# Altium PCB PCB1.PcbDoc (part 2 of 4)
Units mm, origin at the board's own origin, x right, y up, seen from the top; angles counter-clockwise.
Board outline 190.88 x 117.47 mm, 2 copper layers (Top Layer, Bottom Layer); 405 components, 307 nets, 1341 pads, 251 vias.
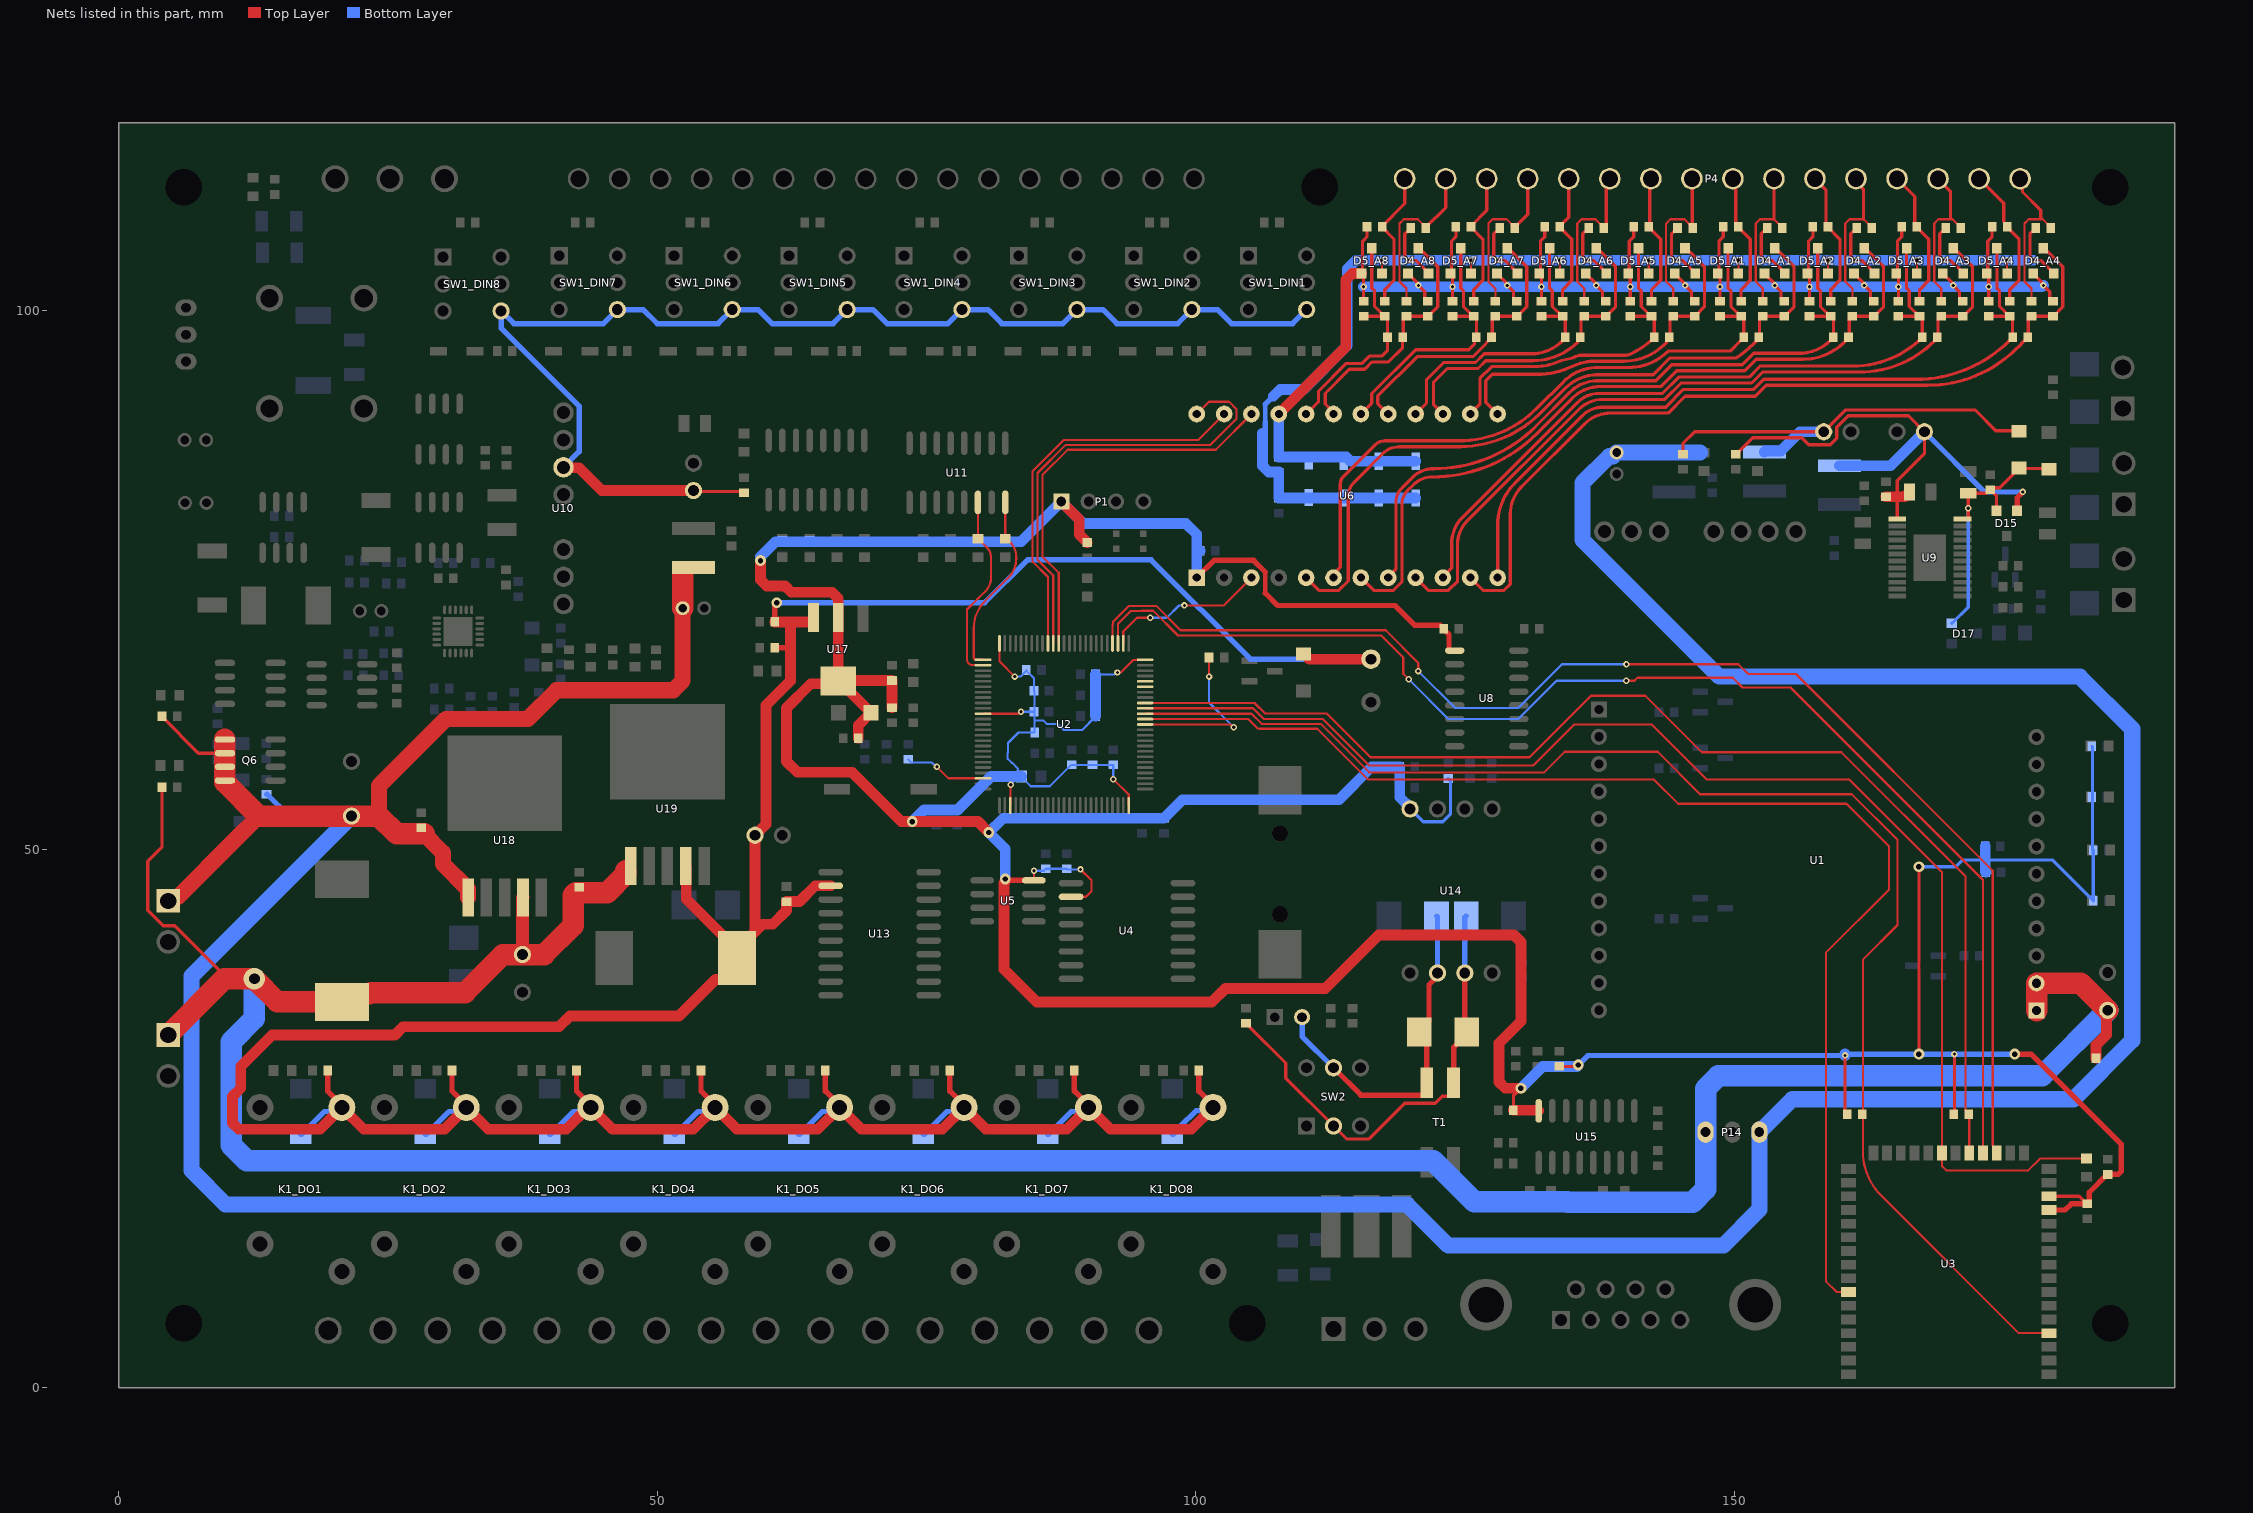
[diagram p2: the nets of this part, all layers, seen from the top]

## Part data
BT1: library part Battery, "Multicell Battery"
C1 C60 C69 C70 C71 C73 C76: library part "Cap Pol1", "Polarized Capacitor (Radial)"
C2 C3 C4 C7 C8 C9 C10 C11 C12 C13 C14 C15 C16 C17 C18 C19 C20 C27 C31 C32 C44 C45 C47 C48 C49 C50 C51 C52 C53 C54 C55 C56 C57 C58 C59 C80: library part 无极电容, "无极电容"
C5 C28 C64 C66 C68 C72 C74 C75 C77: library part Cap, "Capacitor"
C6 C21_A1 C21_A2 C21_A3 C21_A4 C21_A5 C21_A6 C21_A7 C21_A8 C22_A1 C22_A2 C22_A3 C22_A4 C22_A5 C22_A6 C22_A7 C22_A8 C23_A1 C23_A2 C23_A3 C23_A4 C23_A5 C23_A6 C23_A7 C23_A8 C24 C25 C33 C34 C35 C36 C37 C38 C39 C40 C41 C42 C78 C82 C83: library part CAP, "Capacitor"
C26 C29 C30 C43 C46 C81 C84 C85: library part 有极电容, "有极电容"
C62: library part Cap, "50V，10%，X7R"
C63: library part Cap, "16V，10%，X7R"
C65: library part "Cap Pol1", "50V，10%，X7R"
C67: library part Cap, "50V, 10%, X7R"
C79: library part 有极电容, "钽电容"
D1 D2: library part "D Zener", "Zener Diode"
D3 D10 D11 D13 D26 D27 D28: library part "D Schottky", "Schottky Diode"
D4_A1 D4_A2 D4_A3 D4_A4 D4_A5 D4_A6 D4_A7 D4_A8 D5_A1 D5_A2 D5_A3 D5_A4 D5_A5 D5_A6 D5_A7 D5_A8 D15 D17: "Silicon Low-Leakage Diode Array connected in series"
D6 D7 D8 D9 D20_DIN1 D20_DIN2 D20_DIN3 D20_DIN4 D20_DIN5 D20_DIN6 D20_DIN7 D20_DIN8: "Surface Mount Zener Diode"
D12 D14 D16 D23 D25: library part SMBJ12CA, "Transient Voltage  Suppressors (TVS)"
D21_DO1 D21_DO2 D21_DO3 D21_DO4 D21_DO5 D21_DO6 D21_DO7 D21_DO8: library part Diode, "Default Diode"
D24: "Transient Voltage  Suppressors (TVS)"
FB1 FB2 R1 R2 R3 R4 R6 R7 R8 R9 R10 R11 R12 R13 R15 R16 R17 R18 R19 R20 R21 R22 R23_A1 R23_A2 R23_A3 R23_A4 R23_A5 R23_A6 R23_A7 R23_A8 R24_A1 R24_A2 R24_A3 R24_A4 R24_A5 R24_A6 R24_A7 R24_A8 R25_A1 R25_A2 R25_A3 R25_A4 R25_A5 R25_A6 R25_A7 R25_A8 R26_A1 R26_A2 R26_A3 R26_A4 R26_A5 R26_A6 R26_A7 R26_A8 R27 R29 R30 R37 R38 R39 R41 R42 R43 R44 R45 R46 R47 R48 R49 R50_DIN1 R50_DIN2 R50_DIN3 R50_DIN4 R50_DIN5 R50_DIN6 R50_DIN7 R50_DIN8 R51_DIN1 R51_DIN2 R51_DIN3 R51_DIN4 R51_DIN5 R51_DIN6 R51_DIN7 R51_DIN8 R52_DO1 R52_DO2 R52_DO3 R52_DO4 R52_DO5 R52_DO6 R52_DO7 R52_DO8 R53 R54 R55 R56 R57 R58 R59 R60 R61 R62 R63 R64: library part 电阻, "电阻"
GDT1: "Gas Discharge Tube"
J1: library part "D Connector 9", "Receptacle Assembly, 9 Position, Right Angle"
L1 L2 L3 L4: library part "Inductor Iron", "Magnetic-Core Inductor"
L5 L6 L7: library part Inductor, "Inductor"
LED1 LED2 LED3 LED4 LED5 LED6 LED7 LED8 LED9 LED10 LED11 LED12 LED13 LED14 LED15_DO1 LED15_DO2 LED15_DO3 LED15_DO4 LED15_DO5 LED15_DO6 LED15_DO7 LED15_DO8 LED16 LED17 LED18 LED19 LED20 LED21 LED22 LED23 LED24 LED25 LED26: library part LED0603, "Typical INFRARED GaAs LED"
P1: library part "Header 4", "Header, 4-Pin"
P2: library part "Header 2", "Header, 2-Pin"
P5: library part WJ15EDGRC-3.81-3P, "WJ15EDGRC-3.81-3P"
P7: library part "Header 3", "Header, 3-Pin"
P11: library part WJ15EDGRC-3.81-16P, "WJ15EDGRC-3.81-16P"
P14: library part C3-3Pin, "C3连接器插座, 3-Pin"
Q1 Q2 Q3 Q4 Q5: "NPN General Purpose Amplifier"
Q6 Q9 Q10 Q11: "P-Channel Power MOSFET"
Q7: library part S8050, "NPN General Purpose Amplifier"
Q12 Q13: "N-Channel Power MOSFET"
R5 R28 R40 R68 R69 R77 R78 R81 R86 R88 R89 R90 R91 R92: library part Res2, "精度5%"
R65 R66 R67 R70 R82: library part Res1, "精度5%"
R71 R72 R73 R74 R75 R76: library part Res1, "精度0.5%"
R79 R80 R84 R85: library part Res2, "精度0.5%"
R83 R87: library part Res2, "精度1%"
RAC1 RSR1: library part Res1, "Resistor"
S1: library part SW-PB, "Switch"
S2: library part SW-DPST, "Double-Pole, Single-Throw Switch"
SU1: library part Bell, "Electrical Bell"
SW1_DIN1 SW1_DIN2 SW1_DIN3 SW1_DIN4 SW1_DIN5 SW1_DIN6 SW1_DIN7 SW1_DIN8 SW2: "按键开关 六脚 外扣 有声自锁"
T1: "共模电感，电感 @ 频率：51uH @ 100kHz ，直流电阻（DCR）（最大） 140mΩ"
U1: library part Component_1
U2: library part STM32F103VX, "STM32F103VX"
U4: "高精度、I2C接口、集成RTC/TCXO/晶体"
U5: library part MB85RC16V
U7: "3W，宽电压输入，隔离稳压正负双路/单路输出 DC/DC 模块电源"
U8: "Robust EMC, Low Power, 4 Out Channel, 2 Input Channel Digital Isolators."
U9: "单通道、12/16位、串行输入、内置电流源 / 和电压输出DAC，具有HART连接能力"
U10: "3W，宽电压输入，隔离稳压输出 DC/DC 模块电源"
U11 U12: library part TLP624-4
U13: library part TPIC6B595
U14: "隔离485"
U15: "3.0V TO 5.5V, Low-Power, up to 1Mbps, True RS-232 Transceiver Using Four 0.1礔 External Capacitor"
U16: library part BQ24616, "TI电源管理IC；"
U17: library part ams1117, "ams1117"
U18 U19: library part XL2596S, "3A 150KHz 40V Buck DC to DC Converter"

## Free pads (board coordinates)
  round 1.524 hole 3.4: 1(6,6) 1(104.775,6) 1(111.506,111.506) 1(184.881,111.475) 1(184.881,6) 2(6,111.475)

## Via types
v1: diameter 0.6, hole 0.3, Top Layer to Bottom Layer, 163 vias
v2: diameter 0.8, hole 0.4, Top Layer to Bottom Layer, 40 vias
v3: diameter 1, hole 0.5, Top Layer to Bottom Layer, 30 vias
v4: diameter 1.27, hole 0.711, Top Layer to Bottom Layer, 11 vias
v5: diameter 1.5, hole 1, Top Layer to Bottom Layer, 4 vias
v6: diameter 2, hole 1.5, Top Layer to Bottom Layer, 2 vias
v7: diameter 2, hole 1, Top Layer to Bottom Layer, 1 vias

## Nets (pads, with @x,y where several pads share a name; then routed paths per layer and width w, separated by ;. In a path a pad name is that pad's centre, name@x,y a point inside that pad or via, vN(x,y) a via of type N, cw(c..) or ccw(c..) an arc to the next point about the centre after c; other vN are vias at no path point)
3V3: C3.2 C7.1 C8.2 C9.2 C10.2 C11.2 C12.2 C13.2 C14.2 C15.2 C16.2 C17.2 C18.2 C19.2 C20.2 C24.1 C31.2 C49.1 C50.1 C53.2 C79.1 C80.2 FB1.1 P1.1 R1.2 R2.2 R4.2 R6.2 R7.2 R8.2 R15.2 R16.2 R18.1 R19.1 R20.1 R21.2 R22.2 R40.2 R42.2 R43.2 R44.2 R45.2 R46.2 R47.2 R48.2 R49.2 R56.2 R60.2 U2.11 U2.28 U2.50 U2.75 U2.100 U3.13 U3.14 U4.2 U5.8 U6.1 U8.1 U14.1 U15.16 U17.2 | length 505.1
  Top Layer w0.2: U2.11@80.232,62.595 83.466,62.595 ; U2.100@81.757,69.12 81.757,67.468 v1(83.185,66.04) ; U2.28@82.757,54.07 82.767,54.08 82.767,55.959 v1(82.815,56.007) ; U5.8@84.95,47.117 84.963,47.13 v1(84.963,48.006) ; U4.2@88.405,45.593 89.789,45.593 90.297,46.101 90.297,47.117 v1(89.281,48.133) ; v1(92.329,56.515) 93.757,55.087 U2.50@93.757,54.07 ; v1(92.71,66.421) 93.027,66.421 94.201,67.595 U2.75@95.282,67.595
  Top Layer w0.3: C53.2@129.478,25.781 129.478,27.116 v3@129.826,27.464 ; R60.2@133.726,29.845 135.382,29.845 v3(135.509,29.972) ; R16.2@160.274,25.4 v1(160.274,30.861) ; v3(167.132,30.988) v3(167.132,48.387) ; R21.2@170.434,25.369 v1(170.434,30.988) ; U3.14@179.197,17.78 182.006,17.78 182.703,17.083 C3.2@182.753,17.083
  Top Layer w0.4: 106.435,73.796 106.435,75.754
  Top Layer w0.5: v3@82.558,47.117 U5.8@84.95,47.117 ; U6.1@100.076,75.224 101.687,76.835 105.354,76.835 106.435,75.754 ; 106.435,73.796 107.587,72.644 118.491,72.644 120.332,70.802 122.681,70.802 122.798,70.685 122.848,70.685 122.998,70.535 C31.2@122.998,70.485 122.998,70.435 123.494,69.939 123.494,68.499 123.54,68.453 U8.1@124.028,68.453 ; v3(176.022,30.988) 177.546,30.988 185.928,22.606 185.928,20.116 185.635,19.823 184.858,19.823 184.847,19.812 184.608,19.812 182.953,18.157 182.953,17.233 182.803,17.083 C3.2@182.753,17.083 ; U3.13@179.197,16.51 180.713,16.51 181.286,17.083 C3.2@182.703,17.083
  Top Layer w1: v3(59.563,76.808) 59.563,75.035 60.149,74.449 61.849,74.449 62.422,73.876 66.202,73.876 66.788,73.29 U17.2@66.788,71.528 U17.2@66.788,65.628 ; U17.2@68.202,65.682 R40.2@71.787,65.682 R19.1@71.787,63.145 ; C80.2@68.645,60.325 68.645,61.511 C79.1@69.816,62.682 69.616,62.882 67.938,64.56 67.938,64.778 67.088,65.628 U17.2@66.788,65.628 ; v3(80.772,51.562) 79.756,52.578 v3(73.66,52.578) 72.644,52.578 68.072,57.15 62.992,57.15 61.976,58.166 61.976,63.119 64.224,65.367 66.527,65.367 U17.2@66.788,65.628 ; v3@82.296,46.99 82.169,46.863 82.169,38.862 85.217,35.814 101.473,35.814 102.743,37.084 112.014,37.084 116.967,42.037 129.54,42.037 130.175,41.402 130.175,34.036 128.143,32.004 128.143,28.399 128.729,27.813 v3(130.175,27.813) ; P1.1@87.503,82.296 89.167,80.632 89.167,79.238 R15.2@89.916,78.489 ; C53.2@129.478,25.781 131.763,25.781 U15.16@131.826,25.718
  Bottom Layer w0.2: v1(82.815,56.007) 82.815,56.022 83.148,56.355 83.409,56.355 83.409,56.369 FB1.1@83.809,56.769 83.468,57.11 83.468,57.502 82.935,58.035 82.899,58.035 82.516,58.419 82.516,58.96 82.55,58.995 82.55,59.872 83.522,60.844 C15.2@85.025,60.844 85.025,61.976 ; v1(83.185,66.04) 83.704,66.04 C12.2@84.259,66.595 ; v1(83.757,62.778) C13.2@84.96,62.778 ; FB1.1@83.878,56.65 84.663,55.865 86.429,55.865 88.412,57.847 C9.2@88.462,57.847 C16.2@90.395,57.847 C10.2@92.329,57.847 v1(92.329,56.515) ; C12.2@84.259,66.645 C12.2@84.259,66.595 ; v1(84.963,48.006) 85.87,48.006 C7.1@86.059,48.195 C8.2@88.011,48.195 88.073,48.133 v1(89.281,48.133) ; C18.2@90.678,62.377 90.678,62.327 89.438,61.087 87.725,61.087 87.164,61.648 86.139,61.648 85.811,61.976 85.025,61.976 ; C17.2@90.678,66.245 92.426,66.245 92.602,66.421 v1(92.71,66.421) ; C12.2@84.259,66.595 84.96,65.894 C14.2@84.96,64.711 85.025,64.646 85.025,61.976
  Bottom Layer w0.254: R47.2@64.135,78.551 R47.2@64.135,78.678
  Bottom Layer w0.3: U14.1@119.888,53.757 121.092,52.553 122.927,52.553 123.632,53.258 123.632,56.382 R56.2@123.437,56.577 ; v3(167.132,48.387) 170.561,48.387 171.196,49.022 173.287,49.022 179.513,49.022 183.023,45.512 183.073,45.512 R6.2@183.323,45.262 ; R1.2@183.196,59.563 183.259,59.5 183.259,49.975 R7.2@183.323,49.911 R6.2@183.323,45.262 ; R6.2@183.323,45.212 R6.2@183.323,45.262
  Bottom Layer w0.5: v3(135.509,29.972) 136.398,30.861 v1(160.274,30.861) ; v1@160.274,30.988 v3(167.132,30.988) v1(170.434,30.988) v3(176.022,30.988)
  Bottom Layer w1: v3(59.563,76.808) 59.563,77.162 60.952,78.551 64.135,78.551 R45.2@66.675,78.551 R43.2@69.215,78.551 R48.2@74.676,78.551 R46.2@77.216,78.551 R44.2@79.756,78.551 R42.2@82.296,78.551 83.758,78.551 P1.1@87.503,82.296 89.535,80.264 99.06,80.264 100.076,79.248 C24.1@100.076,77.724 ; v3(73.66,52.578) 74.741,53.659 C11.2@75.917,53.659 C19.2@77.851,53.659 80.961,56.769 FB1.1@83.809,56.769 ; v3(82.296,47.244) 82.295,50.039 82.002,50.331 v3(80.772,51.562) 82.107,52.897 R20.1@94.996,52.897 R18.1@97.028,52.897 98.741,54.61 113.284,54.61 116.332,57.658 C50.1@118.934,57.658 C49.1@118.934,55.724 118.934,54.837 119.888,53.883 U14.1@119.888,53.757 ; C18.2@90.678,62.377 C20.2@90.678,64.311 C17.2@90.678,66.245 ; U6.1@100.076,75.224 C24.1@100.076,77.724 ; C24.1@100.392,77.724 C24.1@100.076,77.724 ; v3(130.175,27.813) 132.207,29.845 135.382,29.845 v3(135.509,29.972) ; v1(160.274,30.861) v1@160.274,30.988 ; R4.2@173.287,50.292 173.287,49.022 173.287,47.944 R2.2@173.352,47.879
5V: C48.2 C78.2 C85.1 D3.2 D21_DO1.2 D21_DO2.2 D21_DO3.2 D21_DO4.2 D21_DO5.2 D21_DO6.2 D21_DO7.2 D21_DO8.2 K1_DO1.2 K1_DO2.2 K1_DO3.2 K1_DO4.2 K1_DO5.2 K1_DO6.2 K1_DO7.2 K1_DO8.2 L7.2 R28.2 R52_DO1.1 R52_DO2.1 R52_DO3.1 R52_DO4.1 R52_DO5.1 R52_DO6.1 R52_DO7.1 R52_DO8.1 SU1.2 U13.2 U17.3 U19.4 | length 357.1
  Top Layer w0.5: R52_DO1.1@19.369,29.464 19.369,27.542 20.691,26.22 K1_DO1.2@20.691,26.035 ; R52_DO2.1@30.926,29.464 30.926,27.542 32.248,26.22 K1_DO2.2@32.248,26.035 ; R52_DO3.1@42.483,29.464 42.483,27.542 43.805,26.22 K1_DO3.2@43.805,26.035 ; R52_DO4.1@54.04,29.464 54.04,27.542 55.362,26.22 K1_DO4.2@55.362,26.035 ; R28.2@60.898,68.707 62.23,68.707 62.357,68.834 ; C78.2@60.898,71.12 60.898,71.32 60.898,72.574 61.087,72.763 v3(61.087,72.898) ; R52_DO5.1@65.597,29.464 65.597,27.542 66.919,26.22 K1_DO5.2@66.919,26.035 ; R52_DO6.1@77.154,29.464 77.154,27.542 78.476,26.22 K1_DO6.2@78.476,26.035 ; R52_DO7.1@88.711,29.464 88.711,27.542 90.033,26.22 K1_DO7.2@90.033,26.035 ; R52_DO8.1@100.268,29.464 100.268,27.542 K1_DO8.2@101.59,26.22 ; K1_DO8.2@101.59,26.22 K1_DO8.2@101.59,26.035 K1_DO8.2@101.59,26.22
  Top Layer w1: U19.4@52.629,48.455 52.663,48.42 52.663,45.398 57.135,40.926 L7.2@57.389,40.926 ; C78.2@60.898,71.12 62.357,71.12 ; U17.3@64.488,71.528 64.488,71.12 62.357,71.12 ; U13.2@66.084,46.609 64.643,46.609 63.181,45.147 C48.2@61.976,45.147 61.976,44.323 60.706,43.053 59.77,43.053 L7.2@59.055,42.338 ; K1_DO8.2@101.59,26.035 99.558,24.003 92.065,24.003 K1_DO7.2@90.033,26.035 88.001,24.003 80.508,24.003 K1_DO6.2@78.476,26.035 76.444,24.003 68.951,24.003 K1_DO5.2@66.919,26.035 64.887,24.003 57.394,24.003 K1_DO4.2@55.362,26.035 53.33,24.003 45.837,24.003 K1_DO3.2@43.805,26.035 43.561,26.035 41.529,24.003 34.28,24.003 K1_DO2.2@32.248,26.035 30.216,24.003 22.723,24.003 K1_DO1.2@20.691,26.035 18.659,24.003 11.127,24.003 10.541,24.589 10.541,27.051 11.303,27.813 11.303,29.845 14.224,32.766 25.631,32.766 26.381,33.516 40.859,33.516 41.875,34.532 51.999,34.532 55.389,37.922 56.139,37.922 57.389,39.172 L7.2@57.389,39.922 57.389,40.672 L7.2@59.055,42.338 ; D3.2@109.982,68.121 110.082,68.021 110.182,68.021 110.544,67.659 SU1.2@116.244,67.659 ; L7.2@59.055,42.338 C85.1@59.055,51.308 60.071,52.324 60.071,63.373 62.357,65.659 62.357,68.834 62.357,71.12
  Bottom Layer w0.5: D21_DO1.2@16.891,23.554 16.991,23.554 19.089,25.652 20.308,25.652 K1_DO1.2@20.691,26.035 ; D21_DO2.2@28.448,23.554 28.548,23.554 30.646,25.652 31.865,25.652 K1_DO2.2@32.248,26.035 ; D21_DO3.2@40.005,23.554 40.105,23.554 42.203,25.652 43.422,25.652 K1_DO3.2@43.805,26.035 ; D21_DO4.2@51.562,23.554 51.662,23.554 53.76,25.652 54.979,25.652 K1_DO4.2@55.362,26.035 ; v3(61.087,72.898) 80.385,72.898 84.364,76.877 95.837,76.877 105.055,67.659 SU1.2@116.244,67.659 ; D21_DO5.2@63.119,23.554 63.219,23.554 65.317,25.652 66.536,25.652 K1_DO5.2@66.919,26.035 ; D21_DO6.2@74.676,23.554 74.776,23.554 76.874,25.652 78.093,25.652 K1_DO6.2@78.476,26.035 ; D21_DO7.2@86.233,23.554 86.333,23.554 88.431,25.652 89.65,25.652 K1_DO7.2@90.033,26.035 ; D21_DO8.2@97.79,23.554 97.89,23.554 98.54,24.204 98.54,24.245 100.046,25.751 K1_DO8.2@101.306,25.751
12V: C1.1 C2.2 C83.1 C84.1 L6.2 P13.1 P14.1 R88.2 U1.13 U1.14 U18.4 U19.1 | length 300.3
  Top Layer w0.3: R88.2@3.999,55.753 3.999,50.236 2.667,48.905 2.667,44.346 4.107,42.906 5.195,42.906 9.779,38.322 9.779,37.973
  Top Layer w1: C2.2@183.577,30.607 183.577,31.809 184.543,32.775 184.543,34.937 C1.1@184.658,35.052
  Top Layer w1.2: C84.1@37.459,40.231 37.488,40.259 37.488,45.506 U18.4@37.516,45.534
  Top Layer w2: P13.1@4.572,32.766 9.779,37.973 v7(12.573,37.973) 14.717,35.829 L6.2@20.701,35.829 21.451,36.579 23.248,36.579 23.372,36.703 32.131,36.703 35.659,40.231 C84.1@37.459,40.231 39.469,40.231 42.164,42.926 42.164,45.72 42.418,45.974 45.327,45.974 47.058,47.705 U19.1@47.058,47.99 ; U1.13@178.054,35.027 U1.14@178.054,37.567 182.143,37.567 C1.1@184.658,35.052
  Bottom Layer w2: v7(12.573,37.973) 12.573,34.29 10.414,32.131 10.414,22.519 11.851,21.082 122.047,21.082 125.857,17.272 134.454,17.272 134.484,17.242 146.118,17.242 147.32,18.444 P14.1@147.32,23.749 147.32,27.784 148.492,28.956 178.562,28.956 C1.1@184.658,35.052
24V: C26.1 C28.2 C43.1 C81.1 C82.1 L1.1 L4.1 P12.1 P14.3 Q6.5 Q6.6 Q6.7 Q6.8 R5.2 U18.1 | length 444.7
  Top Layer w0.254: C82.1@28.067,52.005 28.067,51.689 28.321,51.435
  Top Layer w0.3: R5.2@3.999,62.357 3.999,62.307 7.378,58.928 Q6.6@9.842,58.928
  Top Layer w1.5: P12.1@4.572,45.212 4.922,45.562 5.463,45.562 10.725,50.824 12.987,53.086 ; 24.13,53.086 24.13,55.88 30.353,62.103 37.973,62.103 40.64,64.77 51.461,64.77 52.34,65.649 C43.1@52.34,72.39 ; 28.321,51.435 30.074,49.682 30.074,48.655 32.41,46.319 U18.1@32.41,45.534
  Top Layer w2: Q6.8@9.842,56.388 Q6.8@9.842,56.231 ; Q6.5@9.842,60.198 Q6.6@9.842,58.928 Q6.7@9.842,57.658 Q6.8@9.842,56.231 ; 28.321,51.435 25.781,51.435 24.13,53.086 C81.1@21.59,53.086 12.987,53.086 Q6.8@9.842,56.231 ; C43.1@52.34,72.39 L4.1@52.34,75.778
  Bottom Layer w0.5: C28.2@13.7,55.115 13.75,55.115 15.779,53.086 C81.1@21.59,53.086
  Bottom Layer w1.5: C81.1@21.59,53.086 6.731,38.227 6.731,20.193 9.906,17.018 119.634,17.018 123.444,13.208 148.971,13.208 152.32,16.557 152.32,23.999 152.57,23.999 155.368,26.797 181.483,26.797 186.944,32.258 186.944,61.174 182.078,66.04 148.59,66.04 135.89,78.74 135.89,84.016 138.38,86.506 138.719,86.506 C26.1@139.065,86.852 144.399,86.852 146.796,86.852
+DAC_15V: C29.1 D13.1 L2.1 R29.2 | length 40.6
  Top Layer w0.3: R29.2@145.217,86.679 145.217,87.686 146.304,88.773 C29.1@158.293,88.773 160.325,90.805 172.339,90.805 174.272,88.872 D13.1@176.443,88.872
  Bottom Layer w1: L2.1@152.781,86.89 152.881,86.99 154.3,86.99 156.083,88.773 C29.1@158.293,88.773
+ISO_DI_12V: C46.1 R41.2 SW1_DIN1.6 SW1_DIN2.6 SW1_DIN3.6 SW1_DIN4.6 SW1_DIN5.6 SW1_DIN6.6 SW1_DIN7.6 SW1_DIN8.6 U10.6 | length 118.2
  Top Layer w0.3: C46.1@52.832,83.312 52.928,83.216 57.943,83.216 R41.2@58.039,83.12
  Top Layer w1: U10.6@41.275,85.471 41.309,85.437 42.706,85.437 44.831,83.312 C46.1@52.832,83.312
  Bottom Layer w0.5: U10.6@41.275,85.471 42.729,86.925 42.729,91.153 35.482,98.4 SW1_DIN8.6@35.482,99.989 36.659,98.812 44.973,98.812 SW1_DIN7.6@46.277,100.116 48.678,100.116 49.982,98.812 55.641,98.812 SW1_DIN6.6@56.945,100.116 59.346,100.116 60.65,98.812 66.309,98.812 SW1_DIN5.6@67.613,100.116 70.014,100.116 71.318,98.812 76.977,98.812 SW1_DIN4.6@78.281,100.116 80.682,100.116 81.986,98.812 87.645,98.812 SW1_DIN3.6@88.949,100.116 91.35,100.116 92.654,98.812 98.313,98.812 SW1_DIN2.6@99.617,100.116 102.018,100.116 103.322,98.812 108.981,98.812 SW1_DIN1.6@110.285,100.116
+VDAC: C34.1 C35.1 D11.2 D13.2 D15.2 D17.2 U9.24 | length 25.2
  Top Layer w0.3: U9.24@171.171,80.67 171.629,80.67 171.704,80.745 v1@171.704,81.91 ; v1(171.704,81.661) v1@171.704,81.91 ; D15.2@174.332,81.439 174.332,82.846 173.804,83.374 C35.1@173.754,83.374 ; D11.2@179.197,85.245 179.07,85.372 176.443,85.372 174.654,83.583 173.963,83.583 C35.1@173.754,83.374 ; v1@171.704,81.91 C34.1@171.704,83.074 173.404,83.074 173.704,83.374 C35.1@173.754,83.374
  Bottom Layer w0.3: D17.2@170.18,70.988 170.205,70.988 171.704,72.487 v1(171.704,81.661)
-DAC_15V: C30.2 C36.1 C37.1 D15.1 L3.1 R30.2 U9.1 | length 55
  Top Layer w0.3: R30.2@150.114,86.679 150.164,86.679 151.704,88.219 156.256,88.219 156.906,87.569 158.894,87.569 159.512,88.187 159.512,89.209 160.554,90.251 166.162,90.251 C30.2@167.64,88.773 167.64,86.741 165.125,84.226 165.125,82.739 U9.1@165.125,80.67
  Top Layer w0.5: D15.1@176.232,81.439 176.263,81.47 176.263,82.664 v1(176.784,83.185)
  Top Layer w1: C37.1@164.084,82.739 165.125,82.739 165.813,82.739 165.984,82.91 166.259,82.91 C36.1@166.259,83.185
  Bottom Layer w0.5: C30.2@167.64,88.773 173.228,83.185 v1(176.784,83.185)
  Bottom Layer w1: L3.1@159.766,85.62 164.487,85.62 C30.2@167.64,88.773
A: D24.1 D25.2 P2.2 SW2.5 T1.4 U14.9 | length 33.1
  Top Layer w0.5: SW2.5@112.776,29.718 115.316,27.178 121.082,27.178 121.432,27.528 T1.4@121.432,28.338 ; T1.4@121.432,28.338 121.432,32.324 D24.1@120.736,33.02 121.636,33.92 121.636,37.427 122.428,38.22 U14.9@122.428,38.517
  Bottom Layer w0.5: P2.2@109.855,34.417 109.855,32.639 SW2.5@112.776,29.718 ; D25.2@122.338,43.815 122.428,43.725 U14.9@122.428,38.517
ADC1_IN0: R82.1 U2.23 | length 7.7
  Top Layer w0.2: v1(75.946,57.658) 77.009,56.595 U2.23@80.232,56.595
  Bottom Layer w0.2: R82.1@73.279,58.355 73.579,58.055 75.495,58.055 75.892,57.658 v1(75.946,57.658)
ADC_CLK: U2.89 U6.22 | length 38
  Top Layer w0.2: U2.89@87.257,69.12 87.257,75.684 85.744,77.197 85.744,84.755 88.092,87.103 101.835,87.103 U6.22@105.156,90.424
ADC_CS: U2.77 U6.3 | length 15.1
  Top Layer w0.2: U2.77@93.257,69.12 93.257,70.23 94.528,71.501 v1(95.758,71.501) ; v1(98.933,72.644) 102.576,72.644 U6.3@105.156,75.224
  Bottom Layer w0.2: v1(95.758,71.501) 97.282,71.501 98.425,72.644 v1(98.933,72.644)
ADC_IN_5.1V_A1: C25.1 D4_A1.2 D4_A2.2 D4_A3.2 D4_A4.2 D4_A5.2 D4_A6.2 D4_A7.2 D4_A8.2 D5_A1.2 D5_A2.2 D5_A3.2 D5_A4.2 D5_A5.2 D5_A6.2 D5_A7.2 D5_A8.2 D6.2 D7.2 D8.2 D9.2 R23_A1.2 R23_A2.2 R23_A3.2 R23_A4.2 R23_A5.2 R23_A6.2 R23_A7.2 R23_A8.2 R27.2 | length 160
  Top Layer w0.2: D5_A8.2@117.282,103.473 v1(117.282,104.709) ; v1(119.7,104.709) v1@119.761,104.648 ; D5_A7.2@125.537,103.473 v1(125.537,104.709) ; v1(127.955,104.709) v1@128.016,104.648 ; D5_A6.2@133.792,103.473 v1(133.792,104.709) ; v1(136.21,104.709) v1@136.271,104.648 ; D5_A5.2@142.047,103.473 v1(142.047,104.709) ; v1(144.465,104.709) v1@144.526,104.648 ; D5_A1.2@150.367,103.473 v1(150.367,104.709) ; v1(152.785,104.709) v1@152.846,104.648 ; D5_A2.2@158.684,103.473 v1(158.684,104.709) ; v1(161.102,104.709) v1@161.163,104.648 ; D5_A3.2@166.939,103.473 v1(166.939,104.709) ; v1(169.357,104.709) v1@169.418,104.648 ; D5_A4.2@175.321,103.473 v1(175.321,104.709) ; v1(177.739,104.709) v1@177.8,104.648
  Top Layer w0.3: v1(119.7,104.709) 119.4,105.009 119.4,107.146 119.65,107.396 119.7,107.396 119.95,107.646 R23_A8.2@119.95,107.696 ; v1@119.761,104.648 120.45,104.648 121.3,103.798 121.6,103.498 D4_A8.2@121.6,103.473 ; v1(127.955,104.709) 127.655,105.009 127.655,107.146 127.905,107.396 127.955,107.396 128.205,107.646 R23_A7.2@128.205,107.696 ; v1@128.016,104.648 128.705,104.648 129.555,103.798 129.855,103.498 D4_A7.2@129.855,103.473 ; v1(136.21,104.709) 135.91,105.009 135.91,107.146 136.16,107.396 136.21,107.396 136.46,107.646 R23_A6.2@136.46,107.696 ; v1@136.271,104.648 136.96,104.648 137.81,103.798 138.11,103.498 D4_A6.2@138.11,103.473 ; v1(144.465,104.709) 144.165,105.009 144.165,107.146 144.415,107.396 144.465,107.396 144.715,107.646 R23_A5.2@144.715,107.696 ; v1@144.526,104.648 145.215,104.648 146.065,103.798 146.365,103.498 D4_A5.2@146.365,103.473 ; v1(152.785,104.709) 152.485,105.009 152.485,107.146 152.735,107.396 152.785,107.396 153.035,107.646 R23_A1.2@153.035,107.696 ; v1@152.846,104.648 153.535,104.648 154.385,103.798 154.685,103.498 D4_A1.2@154.685,103.473 ; v1(161.102,104.709) 160.802,105.009 160.802,107.146 161.052,107.396 161.102,107.396 161.352,107.646 R23_A2.2@161.352,107.696 ; v1@161.163,104.648 161.852,104.648 162.702,103.798 163.002,103.498 D4_A2.2@163.002,103.473 ; v1(169.357,104.709) 169.057,105.009 169.057,107.146 169.307,107.396 169.357,107.396 169.607,107.646 R23_A3.2@169.607,107.696 ; v1@169.418,104.648 170.107,104.648 170.957,103.798 171.257,103.498 D4_A3.2@171.257,103.473 ; v1(177.739,104.709) 177.439,105.009 177.439,107.146 177.689,107.396 177.739,107.396 177.989,107.646 R23_A4.2@177.989,107.696 ; v1@177.8,104.648 178.489,104.648 179.339,103.798 179.639,103.498 D4_A4.2@179.639,103.473
  Bottom Layer w0.4: 106.426,89.662 106.426,91.313
  Bottom Layer w0.5: 106.172,88.646 106.426,88.9 106.426,89.662 ; 106.426,91.313 107.188,92.075
  Bottom Layer w1: 106.172,88.646 106.172,85.611 106.758,85.025 C25.1@107.696,85.025 R27.2@107.696,82.615 120.383,82.615 D8.2@120.396,82.628 ; 107.188,92.075 107.823,92.71 109.982,92.71 114.046,96.774 114.046,103.886 114.869,104.709 v1(117.282,104.709) v1(119.7,104.709) v1(125.537,104.709) v1(127.955,104.709) v1(133.792,104.709) v1(136.21,104.709) v1(142.047,104.709) v1(144.465,104.709) v1(150.367,104.709) v1(152.785,104.709) v1(158.684,104.709) v1(161.102,104.709) v1(166.939,104.709) v1(169.357,104.709) v1(175.321,104.709) v1(177.739,104.709)
ADC_IN_GND_A1: C21_A1.1 C21_A2.1 C21_A3.1 C21_A4.1 C21_A5.1 C21_A6.1 C21_A7.1 C21_A8.1 C23_A1.2 C23_A2.2 C23_A3.2 C23_A4.2 C23_A5.2 C23_A6.2 C23_A7.2 C23_A8.2 C25.2 D4_A1.1 D4_A2.1 D4_A3.1 D4_A4.1 D4_A5.1 D4_A6.1 D4_A7.1 D4_A8.1 D5_A1.1 D5_A2.1 D5_A3.1 D5_A4.1 D5_A5.1 D5_A6.1 D5_A7.1 D5_A8.1 D6.1 D7.1 D8.1 D9.1 R26_A1.2 R26_A2.2 R26_A3.2 R26_A4.2 R26_A5.2 R26_A6.2 R26_A7.2 R26_A8.2 U6.21 | length 181.3
  Top Layer w0.3: C23_A8.2@115.57,100.903 v1(115.57,102.235) 115.57,103.285 D5_A8.1@115.382,103.473 115.478,103.569 115.478,106.465 115.886,106.873 R26_A8.2@115.886,107.823 ; D4_A8.1@119.7,103.473 119.7,103.448 120.597,102.551 120.597,102.424 v1(120.654,102.367) 121.239,101.782 121.239,101.153 121.489,100.903 C21_A8.1@121.539,100.903 ; C23_A7.2@123.825,100.903 v1(123.825,102.235) 123.825,103.285 D5_A7.1@123.637,103.473 123.733,103.569 123.733,106.465 124.141,106.873 R26_A7.2@124.141,107.823 ; D4_A7.1@127.955,103.473 127.955,103.448 128.852,102.551 128.852,102.424 v1(128.909,102.367) 129.494,101.782 129.494,101.153 129.744,100.903 C21_A7.1@129.794,100.903 ; C23_A6.2@132.08,100.903 v1(132.08,102.235) 132.08,103.285 D5_A6.1@131.892,103.473 131.988,103.569 131.988,106.465 132.396,106.873 R26_A6.2@132.396,107.823 ; D4_A6.1@136.21,103.473 136.21,103.448 137.107,102.551 137.107,102.424 v1(137.164,102.367) 137.749,101.782 137.749,101.153 137.999,100.903 C21_A6.1@138.049,100.903 ; C23_A5.2@140.335,100.903 v1(140.335,102.235) 140.335,103.285 D5_A5.1@140.147,103.473 140.243,103.569 140.243,106.465 140.651,106.873 R26_A5.2@140.651,107.823 ; D4_A5.1@144.465,103.473 144.465,103.448 145.362,102.551 145.362,102.424 v1(145.419,102.367) 146.004,101.782 146.004,101.153 146.254,100.903 C21_A5.1@146.304,100.903 ; C23_A1.2@148.655,100.903 v1(148.655,102.235) 148.655,103.285 D5_A1.1@148.467,103.473 148.563,103.569 148.563,106.465 148.971,106.873 R26_A1.2@148.971,107.823 ; D4_A1.1@152.785,103.473 152.785,103.448 153.682,102.551 153.682,102.424 v1(153.74,102.367) 154.324,101.782 154.324,101.153 154.574,100.903 C21_A1.1@154.624,100.903 ; C23_A2.2@156.972,100.903 v1(156.972,102.235) 156.972,103.285 D5_A2.1@156.784,103.473 156.88,103.569 156.88,106.465 157.288,106.873 R26_A2.2@157.288,107.823 ; D4_A2.1@161.102,103.473 161.102,103.448 161.999,102.551 161.999,102.424 v1(162.056,102.367) 162.641,101.782 162.641,101.153 162.891,100.903 C21_A2.1@162.941,100.903 ; C23_A3.2@165.227,100.903 v1(165.227,102.235) 165.227,103.285 D5_A3.1@165.039,103.473 165.135,103.569 165.135,106.465 165.543,106.873 R26_A3.2@165.543,107.823 ; D4_A3.1@169.357,103.473 169.357,103.448 170.254,102.551 170.254,102.424 v1(170.311,102.367) 170.896,101.782 170.896,101.153 171.146,100.903 C21_A3.1@171.196,100.903 ; C23_A4.2@173.609,100.903 v1(173.609,102.235) 173.609,103.285 D5_A4.1@173.421,103.473 173.517,103.569 173.517,106.465 173.925,106.873 R26_A4.2@173.925,107.823 ; D4_A4.1@177.739,103.473 177.739,103.448 178.636,102.551 178.636,102.424 v1(178.693,102.367) 179.278,101.782 179.278,101.153 179.528,100.903 C21_A4.1@179.578,100.903
  Top Layer w1: U6.21@107.696,90.424 113.919,96.647 113.919,102.87 114.522,103.473 D5_A8.1@115.382,103.473
  Bottom Layer w1: U6.21@107.696,90.424 C25.2@107.696,86.425 113.948,86.425 114.344,86.028 D7.1@116.967,86.028 D8.1@120.396,86.028 ; v1(115.57,102.235) v1(123.825,102.235) v1(132.08,102.235) v1(140.335,102.235) v1(148.655,102.235) v1(156.972,102.235) v1(165.227,102.235) v1(173.609,102.235) 178.562,102.235 v1(178.693,102.367)
ADC_SPI_MISO: U2.90 U6.24 | length 42.3
  Top Layer w0.2: U2.90@86.757,69.12 86.757,75.429 85.29,76.896 85.29,84.944 87.903,87.557 101.346,87.557 103.759,89.97 103.759,90.878 103.084,91.553 103.011,91.553 102.997,91.567 101.219,91.567 U6.24@100.076,90.424
ADC_SPI_MOSI: U2.91 U6.23 | length 36.6
  Top Layer w0.2: U2.91@86.257,69.12 86.257,75.287 84.836,76.708 84.836,85.132 87.715,88.011 100.203,88.011 U6.23@102.616,90.424
B: D23.1 D24.2 R54.2 SW2.2 T1.1 U14.8 | length 43.4
  Top Layer w0.3: R54.2@104.648,33.844 104.698,33.844 104.948,33.594 104.948,33.544 108.331,30.161 108.331,28.763 SW2.2@112.776,24.318 112.857,24.318 112.857,24.237 113.98,23.114 116.078,23.114 119.38,26.416 122.235,26.416 122.882,27.063 123.482,27.063 123.932,27.513 T1.1@123.932,28.338
  Top Layer w0.5: T1.1@123.932,28.338 123.932,31.616 125.136,32.82 D24.2@125.136,33.02 124.968,33.188 U14.8@124.968,38.517
  Bottom Layer w0.5: U14.8@124.968,38.517 124.968,43.688 D23.1@125.095,43.815
BEEP_PWM: R17.2 U2.63 | length 15.9
  Top Layer w0.2: U2.63@95.282,61.595 103.188,61.595 103.442,61.341 v1(103.505,61.341) ; v1(101.219,66.04) 101.219,67.563 101.346,67.69 R17.2@101.218,67.818
  Bottom Layer w0.2: v1(101.219,66.04) 101.219,63.627 v1(103.505,61.341)
BLE_2FCT: R21.1 U2.67 U3.21 | length 113.4
  Top Layer w0.2: U2.67@95.282,63.595 105.442,63.595 106.426,62.611 112.141,62.611 116.205,58.547 130.968,58.547 136.683,64.262 141.732,64.262 146.978,59.016 159.932,59.016 171.469,47.479 171.469,25.7 171.807,25.362 U3.21@171.807,21.79
BLE_LINK: LED6.1 U2.66 U3.23 | length 124.8
  Top Layer w0.2: U2.66@95.282,63.095 105.3,63.095 106.292,62.103 111.767,62.103 116.085,57.785 131.318,57.785 135.128,61.595 142.328,61.595 147.447,56.476 160.694,56.476 169.267,47.903 U3.23@169.267,21.79 169.267,20.598 169.672,20.193 177.292,20.193 178.396,21.297 LED6.1@182.702,21.297
BLE_RST: R16.1 U2.65 U3.4 | length 132
  Top Layer w0.2: U2.65@95.282,62.595 105.158,62.595 106.104,61.649 111.579,61.649 116.078,57.15 132.334,57.15 134.239,59.055 142.875,59.055 146.812,55.118 160.909,55.118 165.144,50.883 165.144,42.97 161.925,39.751 161.925,25.4 161.925,21.96 161.925,21.958 ccw(c167.72,21.958) 163.622,17.861 163.624,17.859 176.403,5.08 U3.4@179.197,5.08
BLE_RX: U2.78 U3.20 | length 122.4
  Top Layer w0.2: U2.78@92.757,69.12 92.757,70.946 93.947,72.136 94.978,72.136 94.997,72.155 96.029,72.155 98.334,69.85 117.221,69.85 119.253,67.818 119.253,66.294 v1(119.756,65.791) ; v1(139.954,65.659) 140.716,65.659 140.988,65.931 149.849,65.931 150.756,65.024 155.201,65.024 173.077,47.148 U3.20@173.077,21.79
  Bottom Layer w0.2: v1(119.756,65.791) 123.444,62.103 129.921,62.103 133.477,65.659 v1(139.954,65.659)
BLE_TX: U2.79 U3.19 | length 124.7
  Top Layer w0.2: U2.79@92.257,69.12 92.257,70.804 92.303,70.85 92.303,71.134 93.778,72.609 96.301,72.609 98.571,70.339 117.621,70.339 120.65,67.31 v1(120.65,66.548) ; v1(139.973,67.183) 150.368,67.183 151.275,66.276 155.72,66.276 173.99,48.006 173.99,22.507 173.997,22.5 173.997,22.14 U3.19@174.347,21.79
  Bottom Layer w0.2: v1(120.65,66.548) 124.079,63.119 129.921,63.119 133.985,67.183 v1(139.973,67.183)
BLE_WAKE: U2.64 U3.38 | length 119.3
  Top Layer w0.2: U2.64@95.282,62.095 104.861,62.095 105.742,61.214 105.897,61.214 105.916,61.195 111.271,61.195 115.99,56.476 142.533,56.476 144.78,54.229 160.401,54.229 164.352,50.278 164.352,46.242 158.496,40.386 158.496,9.906 159.512,8.89 U3.38@160.577,8.89
CAN_RX: U2.70
CAN_TX: U2.71
CH_H1: C21_A1.2 C22_A1.1 D4_A1.3 R24_A1.1 U6.5 | length 68.1
  Top Layer w0.3: U6.5@110.236,75.224 111.415,74.045 113.264,74.045 114.137,74.918 114.137,82.483 114.137,82.485 114.137,82.737 114.137,82.739 cw(c116.047,82.739) 114.697,84.09 114.878,84.271 117.369,86.762 cw(c118.85,85.282) 118.85,87.376 123.933,87.376 124.603,87.376 124.605,87.378 ccw(c124.373,98.213) 131.871,90.389 131.875,90.389 134.388,92.902 cw(c136.683,90.608) 135.108,93.445 135.112,93.448 cw(c137.354,89.735) 137.119,94.066 137.125,94.072 142.459,94.072 144.018,95.631 150.167,95.631 ccw(c144.76,103.998) 152.121,97.286 C22_A1.1@152.276,97.536 152.336,97.596 152.336,99.253 152.586,99.503 R24_A1.1@152.636,99.503 ; R24_A1.1@152.686,99.503 C21_A1.2@154.624,99.503 154.674,99.503 155.539,100.368 155.539,104.115 154.156,105.498 154.035,105.498 153.735,105.798 D4_A1.3@153.735,105.823
CH_H2: C21_A2.2 C22_A2.1 D4_A2.3 R24_A2.1 U6.7 | length 70.7
  Top Layer w0.3: U6.7@115.316,75.224 116.495,74.045 118.344,74.045 119.126,74.827 119.126,82.063 ; 119.126,82.064 cw(c120.861,82.064) 119.635,83.292 120.199,83.856 cw(c121.951,82.107) 121.949,84.582 121.951,84.582 ccw(c121.951,98.305) 131.655,88.602 134.648,91.595 134.65,91.595 134.972,91.917 cw(c137.497,89.394) 137.497,92.964 137.499,92.964 143.17,92.964 144.648,94.442 150.95,94.442 152.012,95.504 156.379,95.504 ; 156.381,95.504 ccw(c156.381,100.918) 160.21,97.091 C22_A2.1@160.343,97.224 ; C22_A2.1@160.337,97.23 160.593,97.486 C22_A2.1@160.593,97.536 160.653,97.596 160.653,99.253 160.902,99.503 161.003,99.503 C21_A2.2@162.941,99.503 162.991,99.503 163.856,100.368 163.856,104.115 162.473,105.498 162.352,105.498 162.052,105.798 D4_A2.3@162.052,105.823
CH_H3: C21_A3.2 C22_A3.1 D4_A3.3 R24_A3.1 U6.9 | length 72.4
  Top Layer w0.3: U6.9@120.396,75.224 121.575,74.045 123.448,74.045 124.297,74.894 124.297,78.367 ; 124.297,78.368 cw(c127.254,78.368) 125.164,80.46 135.567,90.863 cw(c137.767,88.665) 137.767,91.775 143.548,91.775 145.072,93.299 151.592,93.299 152.608,94.315 161.613,94.315 161.615,94.315 ccw(c161.615,104.15) 168.57,97.196 C22_A3.1@168.598,97.224 ; C22_A3.1@168.598,97.286 C22_A3.1@168.848,97.536 168.908,97.596 168.908,99.253 169.157,99.503 169.258,99.503 C21_A3.2@171.196,99.503 171.246,99.503 172.111,100.368 172.111,104.115 170.728,105.498 170.607,105.498 170.307,105.798 D4_A3.3@170.307,105.823
CH_H4: C21_A4.2 C22_A4.1 D4_A4.3 R24_A4.1 U6.11 | length 77.6
  Top Layer w0.3: U6.11@125.476,75.224 126.655,74.045 128.606,74.045 129.195,74.634 129.195,81.155 129.195,81.156 cw(c132.724,81.156) 130.23,83.653 136.094,89.518 cw(c138.477,87.137) 138.477,90.505 141.011,90.505 143.845,90.505 145.415,92.075 151.935,92.075 152.951,93.091 167.95,93.091 ccw(c167.95,104.763) 176.205,96.511 176.376,96.682 176.397,96.682 176.634,96.919 176.634,96.94 176.93,97.236 176.98,97.236 177.23,97.486 C22_A4.1@177.23,97.536 177.29,97.596 177.29,99.253 177.539,99.503 177.64,99.503 C21_A4.2@179.578,99.503 179.628,99.503 180.493,100.368 180.493,104.115 179.11,105.498 178.989,105.498 178.689,105.798 D4_A4.3@178.689,105.823
CH_H5: C21_A5.2 C22_A5.1 D4_A5.3 R24_A5.1 U6.13 | length 33.4
  Top Layer w0.3: U6.13@128.016,90.424 126.919,91.521 126.919,93.497 127.529,94.107 131.691,94.107 ; 131.692,94.107 ccw(c131.692,101.671) 134.588,94.683 135.385,95.013 cw(c136.983,91.152) 136.983,95.331 139.758,95.331 139.76,95.331 ccw(c139.76,100.595) 143.482,96.873 143.956,97.347 C22_A5.1@143.956,97.536 144.016,97.596 144.016,99.253 144.265,99.503 R24_A5.1@144.316,99.503 ; R24_A5.1@144.366,99.503 C21_A5.2@146.304,99.503 146.354,99.503 147.219,100.368 147.219,104.115 145.836,105.498 145.715,105.498 145.415,105.798 D4_A5.3@145.415,105.823
CH_H6: C21_A6.2 C22_A6.1 D4_A6.3 R24_A6.1 U6.15 | length 30
  Top Layer w0.3: U6.15@122.936,90.424 122.047,91.313 122.047,93.345 123.352,94.65 126.189,94.65 126.916,95.377 131.298,95.377 ; 131.299,95.377 ccw(c131.299,101.249) C22_A6.1@135.451,97.097 ; C22_A6.1@135.451,97.286 C22_A6.1@135.701,97.536 135.761,97.596 135.761,99.253 136.01,99.503 136.111,99.503 C21_A6.2@138.049,99.503 138.099,99.503 138.964,100.368 138.964,104.115 137.581,105.498 137.46,105.498 137.16,105.798 D4_A6.3@137.16,105.823
CH_H7: C21_A7.2 C22_A7.1 D4_A7.3 R24_A7.1 U6.17 | length 26.6
  Top Layer w0.3: U6.17@117.856,90.424 116.886,91.394 116.886,92.1 120.544,95.758 125.73,95.758 126.936,96.965 126.936,96.977 127.446,97.486 C22_A7.1@127.446,97.536 127.506,97.596 127.506,99.253 127.755,99.503 127.856,99.503 C21_A7.2@129.794,99.503 129.844,99.503 130.709,100.368 130.709,104.115 129.326,105.498 129.205,105.498 128.905,105.798 D4_A7.3@128.905,105.823
CH_H8: C21_A8.2 C22_A8.1 D4_A8.3 R24_A8.1 U6.19 | length 23.8
  Top Layer w0.3: U6.19@112.776,90.424 112.776,90.59 112.014,91.352 112.014,92.329 114.254,94.569 115.658,94.569 116.339,95.25 117.856,95.25 119.191,96.585 C22_A8.1@119.191,97.536 119.251,97.596 119.251,99.253 119.5,99.503 119.601,99.503 C21_A8.2@121.539,99.503 121.589,99.503 122.454,100.368 122.454,104.115 121.071,105.498 120.95,105.498 120.65,105.798 D4_A8.3@120.65,105.823
CH_H_C1: P4.7 R23_A1.1 R24_A1.2 | length 14.2
  Top Layer w0.2: R24_A1.2@152.636,100.903 152.636,102.07 151.981,102.724 151.981,108.111 152.37,108.5 153.681,108.5 R23_A1.1@154.435,107.746
  Top Layer w0.3: 153.67,108.511 P4.7@153.67,112.268 ; R23_A1.1@154.435,107.696 R23_A1.1@154.435,107.746
CH_H_C2: P4.5 R23_A2.1 R24_A2.2 | length 14.5
  Top Layer w0.2: R24_A2.2@160.953,100.903 160.953,102.07 160.298,102.724 160.298,108.111 160.687,108.5 161.998,108.5 R23_A2.1@162.752,107.746
  Top Layer w0.3: P4.5@161.29,112.268 161.29,111.95 161.998,111.242 161.998,108.5 ; R23_A2.1@162.752,107.696 R23_A2.1@162.752,107.746
CH_H_C3: P4.3 R23_A3.1 R24_A3.2 | length 14.6
  Top Layer w0.2: R24_A3.2@169.208,100.903 169.208,102.07 168.553,102.724 168.553,108.111 168.942,108.5 170.253,108.5 R23_A3.1@171.007,107.746
  Top Layer w0.3: P4.3@168.91,112.268 170.053,111.125 170.053,108.55 ; R23_A3.1@171.007,107.696 R23_A3.1@171.007,107.746
CH_H_C4: P4.1 R23_A4.1 R24_A4.2 | length 15
  Top Layer w0.2: R24_A4.2@177.59,100.903 177.59,102.07 176.935,102.724 176.935,108.111 177.324,108.5 178.635,108.5 R23_A4.1@179.389,107.746
  Top Layer w0.3: P4.1@176.53,112.268 176.747,112.051 176.747,111.035 178.435,109.347 178.435,108.55 ; R23_A4.1@179.389,107.696 R23_A4.1@179.389,107.746
CH_H_C5: P4.9 R23_A5.1 R24_A5.2 | length 15
  Top Layer w0.2: R24_A5.2@144.316,100.903 144.316,102.07 143.661,102.724 143.661,108.111 144.05,108.5 145.361,108.5 R23_A5.1@146.115,107.746
  Top Layer w0.3: P4.9@146.05,112.268 146.082,112.236 R23_A5.1@146.082,107.778 ; R23_A5.1@146.115,107.696 R23_A5.1@146.115,107.746
CH_H_C6: P4.11 R23_A6.1 R24_A6.2 | length 15.3
  Top Layer w0.2: R24_A6.2@136.061,100.903 136.061,102.07 135.406,102.724 135.406,108.111 135.795,108.5 137.106,108.5 R23_A6.1@137.86,107.746
  Top Layer w0.3: R23_A6.1@137.86,107.746 R23_A6.1@137.86,107.696 138.11,107.946 138.11,111.948 P4.11@138.43,112.268
CH_H_C7: P4.13 R23_A7.1 R24_A7.2 | length 15.5
  Top Layer w0.2: R24_A7.2@127.806,100.903 127.806,102.07 127.151,102.724 127.151,108.111 127.54,108.5 128.851,108.5 R23_A7.1@129.605,107.746
  Top Layer w0.3: R23_A7.1@129.605,107.696 129.605,107.746 130.81,108.951 P4.13@130.81,112.268
CH_H_C8: P4.15 R23_A8.1 R24_A8.2 | length 15.7
  Top Layer w0.2: R24_A8.2@119.551,100.903 119.551,102.07 118.896,102.724 118.896,108.111 119.285,108.5 120.596,108.5 R23_A8.1@121.35,107.746
  Top Layer w0.3: R23_A8.1@121.35,107.696 121.35,107.746 123.19,109.586 P4.15@123.19,112.268
CH_L1: C22_A1.2 C23_A1.1 D5_A1.3 R25_A1.1 U6.6 | length 62.3
  Top Layer w0.3: U6.6@112.776,75.224 112.776,75.562 113.401,76.187 113.401,83.935 ; 113.401,83.936 cw(c114.323,83.936) 113.672,84.589 116.659,87.576 cw(c117.512,86.726) 117.512,87.93 124.372,87.93 124.373,87.93 ccw(c124.373,98.213) 131.645,90.943 134.134,93.432 cw(c137.298,90.27) 137.373,94.742 137.376,94.742 140.174,94.742 140.175,94.742 ccw(c140.175,99.919) 143.844,96.266 148.283,96.266 149.606,96.266 150.541,97.201 150.576,97.236 150.626,97.236 150.876,97.486 C22_A1.2@150.876,97.536 150.876,99.253 150.751,99.378 150.697,99.378 R25_A1.1@150.572,99.503 ; C23_A1.1@148.655,99.503 R25_A1.1@150.572,99.503 ; D5_A1.3@149.417,105.823 149.417,102.108 149.671,101.854 149.671,100.404 R25_A1.1@150.572,99.503 ; R25_A1.1@150.622,99.503 R25_A1.1@150.572,99.503
CH_L2: C22_A2.2 C23_A2.1 D5_A2.3 R25_A2.1 U6.8 | length 64.5
  Top Layer w0.3: U6.8@117.856,75.224 117.856,75.276 118.572,75.992 118.572,79.411 ; 118.572,79.413 118.572,82.205 118.572,82.207 cw(c120.516,82.207) 119.142,83.582 120.073,84.513 cw(c122.078,82.51) 122.076,85.344 ccw(c122.078,98.708) 131.529,89.259 134.678,92.409 cw(c138.99,88.101) 134.984,92.695 134.989,92.698 cw(c136.683,90.608) 135.376,92.96 135.449,93.001 135.455,93.006 cw(c137.354,89.735) 137.134,93.512 137.262,93.512 137.268,93.518 142.688,93.518 144.166,94.996 150.72,94.996 151.782,96.058 156.048,96.058 ; 156.049,96.058 ccw(c156.049,100.08) 158.893,97.236 158.943,97.236 159.193,97.486 C22_A2.2@159.193,97.536 159.193,99.253 159.068,99.378 159.014,99.378 R25_A2.1@158.889,99.503 ; C23_A2.1@156.972,99.503 R25_A2.1@158.889,99.503 ; D5_A2.3@157.734,105.823 157.734,102.108 157.988,101.854 157.988,100.404 R25_A2.1@158.889,99.503 ; R25_A2.1@158.939,99.503 R25_A2.1@158.889,99.503
CH_L3: C22_A3.2 C23_A3.1 D5_A3.3 R25_A3.1 U6.10 | length 66.2
  Top Layer w0.3: U6.10@122.936,75.224 122.936,75.342 123.743,76.149 123.743,78.382 123.743,78.384 cw(c127.215,78.384) 124.761,80.841 135.403,91.483 cw(c137.445,89.443) 137.445,92.329 143.319,92.329 144.843,93.853 151.363,93.853 152.379,94.869 161.008,94.869 ; 161.009,94.869 ccw(c161.009,103.975) C22_A3.2@167.448,97.536 167.448,99.253 167.323,99.378 167.269,99.378 R25_A3.1@167.144,99.503 ; C23_A3.1@165.227,99.503 R25_A3.1@167.144,99.503 ; D5_A3.3@165.989,105.823 165.989,102.108 166.243,101.854 166.243,100.404 R25_A3.1@167.144,99.503 ; R25_A3.1@167.194,99.503 R25_A3.1@167.144,99.503
CH_L4: C22_A4.2 C23_A4.1 D5_A4.3 R25_A4.1 U6.12 | length 71.3
  Top Layer w0.3: U6.12@128.016,75.224 128.016,80.074 ; 128.016,80.075 cw(c133.684,80.075) 129.677,84.084 135.821,90.228 cw(c137.826,88.225) 137.826,91.059 143.616,91.059 145.267,92.71 151.786,92.71 152.721,93.645 166.859,93.645 ; 166.861,93.645 ccw(c166.861,105.905) 175.53,97.236 175.58,97.236 175.83,97.486 C22_A4.2@175.83,97.536 175.83,99.253 175.705,99.378 175.651,99.378 R25_A4.1@175.526,99.503 ; C23_A4.1@173.609,99.503 R25_A4.1@175.526,99.503 ; D5_A4.3@174.371,105.823 174.371,102.108 174.625,101.854 174.625,100.404 R25_A4.1@175.526,99.503 ; R25_A4.1@175.576,99.503 R25_A4.1@175.526,99.503
CH_L5: C22_A5.2 C23_A5.1 D5_A5.3 R25_A5.1 U6.14 | length 31.9
  Top Layer w0.3: U6.14@125.476,90.424 126.365,91.313 126.365,93.726 127.462,94.823 131.528,94.823 131.532,94.827 ccw(c131.299,101.249) 132.049,94.867 cw(c132.084,94.569) 132.084,94.869 ccw(c132.082,97.037) 132.798,94.991 ccw(c132.362,96.237) 132.851,95.011 cw(c132.962,94.732) 132.888,95.023 ccw(c131.299,101.249) 133.909,95.377 133.936,95.383 134.954,95.626 cw(c136.531,92.503) 134.984,95.641 cw(c136.531,92.503) 135.636,95.885 139.764,95.885 ccw(c139.76,100.595) 140.096,95.897 ccw(c140.075,96.196) 140.195,95.921 ccw(c137.075,103.017) 142.553,97.533 C22_A5.2@142.556,97.536 142.556,99.253 142.431,99.378 142.377,99.378 R25_A5.1@142.252,99.503 ; C23_A5.1@140.335,99.503 R25_A5.1@142.252,99.503 ; D5_A5.3@141.097,105.823 141.097,102.108 141.351,101.854 141.351,100.404 R25_A5.1@142.252,99.503 ; R25_A5.1@142.302,99.503 R25_A5.1@142.252,99.503
CH_L6: C22_A6.2 C23_A6.1 D5_A6.3 R25_A6.1 U6.16 | length 28.9
  Top Layer w0.3: U6.16@120.396,90.424 121.412,91.44 121.412,93.599 123.017,95.204 125.959,95.204 126.767,96.012 131.106,96.012 ; 131.108,96.012 ccw(c131.108,100.175) 133.972,97.154 133.975,97.157 134.051,97.233 134.051,97.286 C22_A6.2@134.301,97.536 134.301,99.253 134.176,99.378 134.122,99.378 R25_A6.1@133.997,99.503 ; C23_A6.1@132.08,99.503 R25_A6.1@133.997,99.503 ; D5_A6.3@132.842,105.823 132.842,102.108 133.096,101.854 133.096,100.404 R25_A6.1@133.997,99.503 ; R25_A6.1@134.047,99.503 R25_A6.1@133.997,99.503
CH_L7: C22_A7.2 C23_A7.1 D5_A7.3 R25_A7.1 U6.18 | length 25.3
  Top Layer w0.3: U6.18@115.316,90.424 116.332,91.44 116.332,92.329 120.396,96.393 125.349,96.393 125.857,96.901 125.857,97.347 C22_A7.2@126.046,97.536 126.046,99.253 125.921,99.378 125.867,99.378 R25_A7.1@125.742,99.503 ; C23_A7.1@123.825,99.503 R25_A7.1@125.742,99.503 ; D5_A7.3@124.587,105.823 124.587,102.108 124.841,101.854 124.841,100.404 R25_A7.1@125.742,99.503 ; R25_A7.1@125.792,99.503 R25_A7.1@125.742,99.503
CH_L8: C22_A8.2 C23_A8.1 D5_A8.3 R25_A8.1 U6.20 | length 22.7
  Top Layer w0.3: U6.20@110.236,90.424 111.379,91.567 111.379,92.534 113.968,95.123 115.428,95.123 116.109,95.804 117.267,95.804 117.791,96.328 C22_A8.2@117.791,97.536 117.791,99.253 117.666,99.378 117.612,99.378 R25_A8.1@117.487,99.503 ; C23_A8.1@115.57,99.503 R25_A8.1@117.487,99.503 ; D5_A8.3@116.332,105.823 116.332,102.108 116.586,101.854 116.586,100.404 R25_A8.1@117.487,99.503 ; R25_A8.1@117.537,99.503 R25_A8.1@117.487,99.503
CH_L_C1: P4.8 R25_A1.2 R26_A1.1 | length 12.1
  Top Layer w0.3: P4.8@149.86,112.268 150.121,112.007 R26_A1.1@150.121,108.073 ; R26_A1.1@150.371,107.873 R26_A1.1@150.371,107.823 150.371,107.773 151.477,106.667 151.477,102.833 150.622,101.978 R25_A1.2@150.622,100.903
CH_L_C2: P4.6 R25_A2.2 R26_A2.1 | length 12.5
  Top Layer w0.3: P4.6@157.48,112.268 158.496,111.252 R26_A2.1@158.496,108.015 ; R26_A2.1@158.688,107.873 R26_A2.1@158.688,107.823 158.688,107.773 159.794,106.667 159.794,102.833 158.939,101.978 R25_A2.2@158.939,100.903
CH_L_C3: P4.4 R25_A3.2 R26_A3.1 | length 12.7
  Top Layer w0.3: P4.4@165.1,112.268 166.751,110.617 R26_A3.1@166.751,108.015 ; R26_A3.1@166.943,107.873 R26_A3.1@166.943,107.823 166.943,107.773 168.049,106.667 168.049,102.833 167.194,101.978 R25_A3.2@167.194,100.903
CH_L_C4: P4.2 R25_A4.2 R26_A4.1 | length 12.7
  Top Layer w0.3: P4.2@172.72,112.268 175.006,109.982 175.006,108.299 ; R26_A4.1@175.325,107.873 R26_A4.1@175.325,107.823 175.325,107.773 176.431,106.667 176.431,102.833 175.576,101.978 R25_A4.2@175.576,100.903
CH_L_C5: P4.10 R25_A5.2 R26_A5.1 | length 12.2
  Top Layer w0.3: R26_A5.1@142.051,107.873 R26_A5.1@142.051,107.823 142.051,107.773 143.157,106.667 143.157,102.833 142.302,101.978 R25_A5.2@142.302,100.903 ; R26_A5.1@142.145,107.918 142.145,112.173 P4.10@142.24,112.268
CH_L_C6: P4.12 R25_A6.2 R26_A6.1 | length 12.5
  Top Layer w0.3: R25_A6.2@134.047,100.903 134.047,101.978 134.902,102.833 134.902,106.667 133.796,107.773 R26_A6.1@133.796,107.823 133.796,107.873 134.62,108.697 P4.12@134.62,112.268
CH_L_C7: P4.14 R25_A7.2 R26_A7.1 | length 12.8
  Top Layer w0.3: R25_A7.2@125.792,100.903 125.792,101.978 126.647,102.833 126.647,106.667 125.541,107.773 R26_A7.1@125.541,107.823 125.541,107.873 127,109.332 P4.14@127,112.268
CH_L_C8: P4.16 R25_A8.2 R26_A8.1 | length 13
  Top Layer w0.3: R25_A8.2@117.537,100.903 117.537,101.978 118.392,102.833 118.392,106.667 117.286,107.773 R26_A8.1@117.286,107.823 117.286,107.873 119.38,109.967 P4.16@119.38,112.268
D1_IN: LED7.1 U2.1 U11.16 | length 17.2
  Top Layer w0.2: 79.375,70.558 79.375,67.737 79.508,67.605 80.222,67.605 U2.1@80.232,67.595 ; 79.375,70.559 cw(c82.875,70.559) 80.401,73.035 82.586,75.22 ccw(c80.838,76.971) 83.312,76.971 83.312,77.185 ccw(c81.47,77.185) 82.773,78.487 82.687,78.487 82.637,78.487 LED7.1@82.296,78.828 U11.16@82.296,82.213
D2_IN: LED9.1 U2.2 U11.14 | length 17.7
  Top Layer w0.2: LED9.1@79.756,78.828 U11.14@79.756,82.213 ; LED9.1@79.806,78.828 80.583,78.051 80.585,78.05 cw(c79.675,77.139) 80.961,77.139 80.961,75.134 cw(c79.395,75.134) 80.502,74.025 79.84,73.363 79.698,73.221 78.74,72.263 78.74,70.91 78.74,67.564 78.849,67.301 78.882,67.267 ccw(c79.316,67.762) 79.316,67.105 79.318,67.105 80.222,67.105 U2.2@80.232,67.095